# Altium PCB STM32WL_Before_RePlacement.PcbDoc (part 1 of 2)
Units mm, origin at the board's own origin, x right, y up, seen from the top; angles counter-clockwise.
Board outline 40.25 x 54.25 mm, 4 copper layers (Top Layer, Int1 (GND), Int2 (PWR), Bottom Layer), stack 1.57 mm thick; 116 components, 68 nets, 370 pads, 249 vias.
Unrouted connection lines stored in the file: 2.
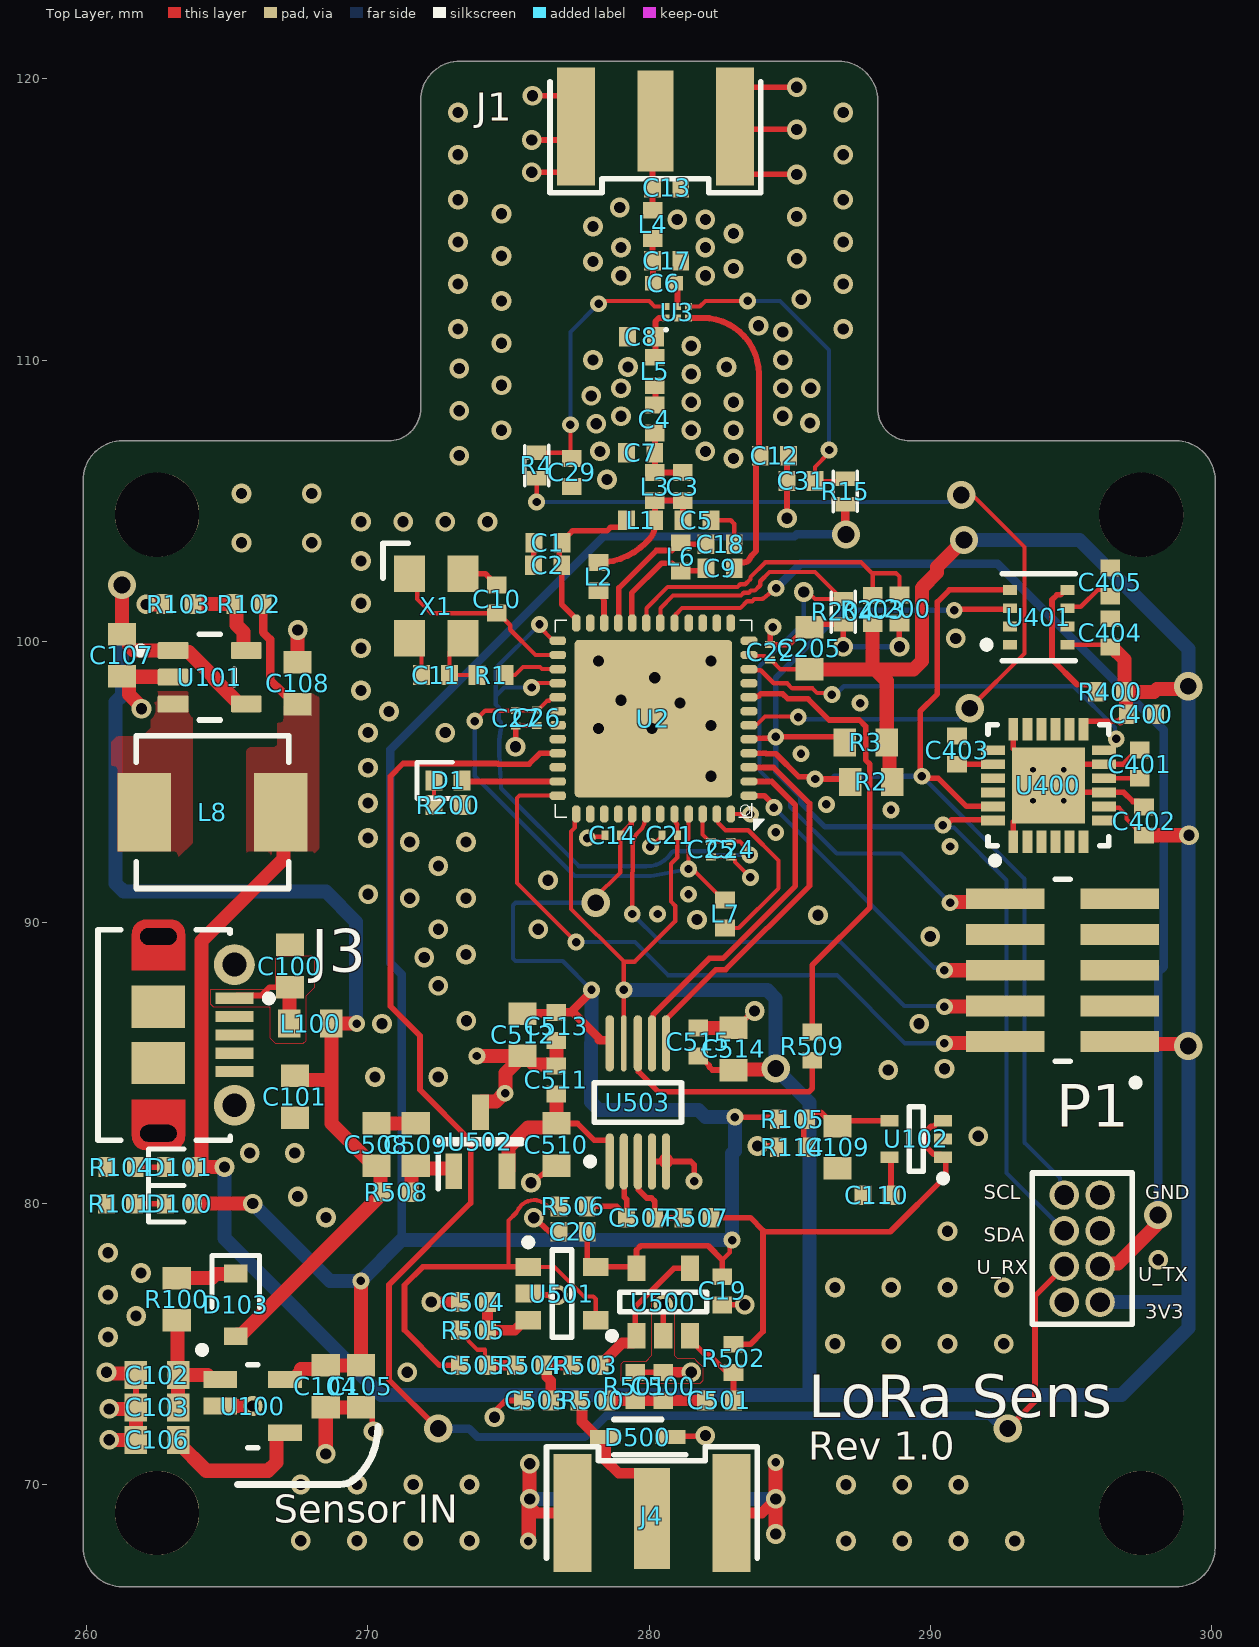
[diagram p0: Top Layer view]
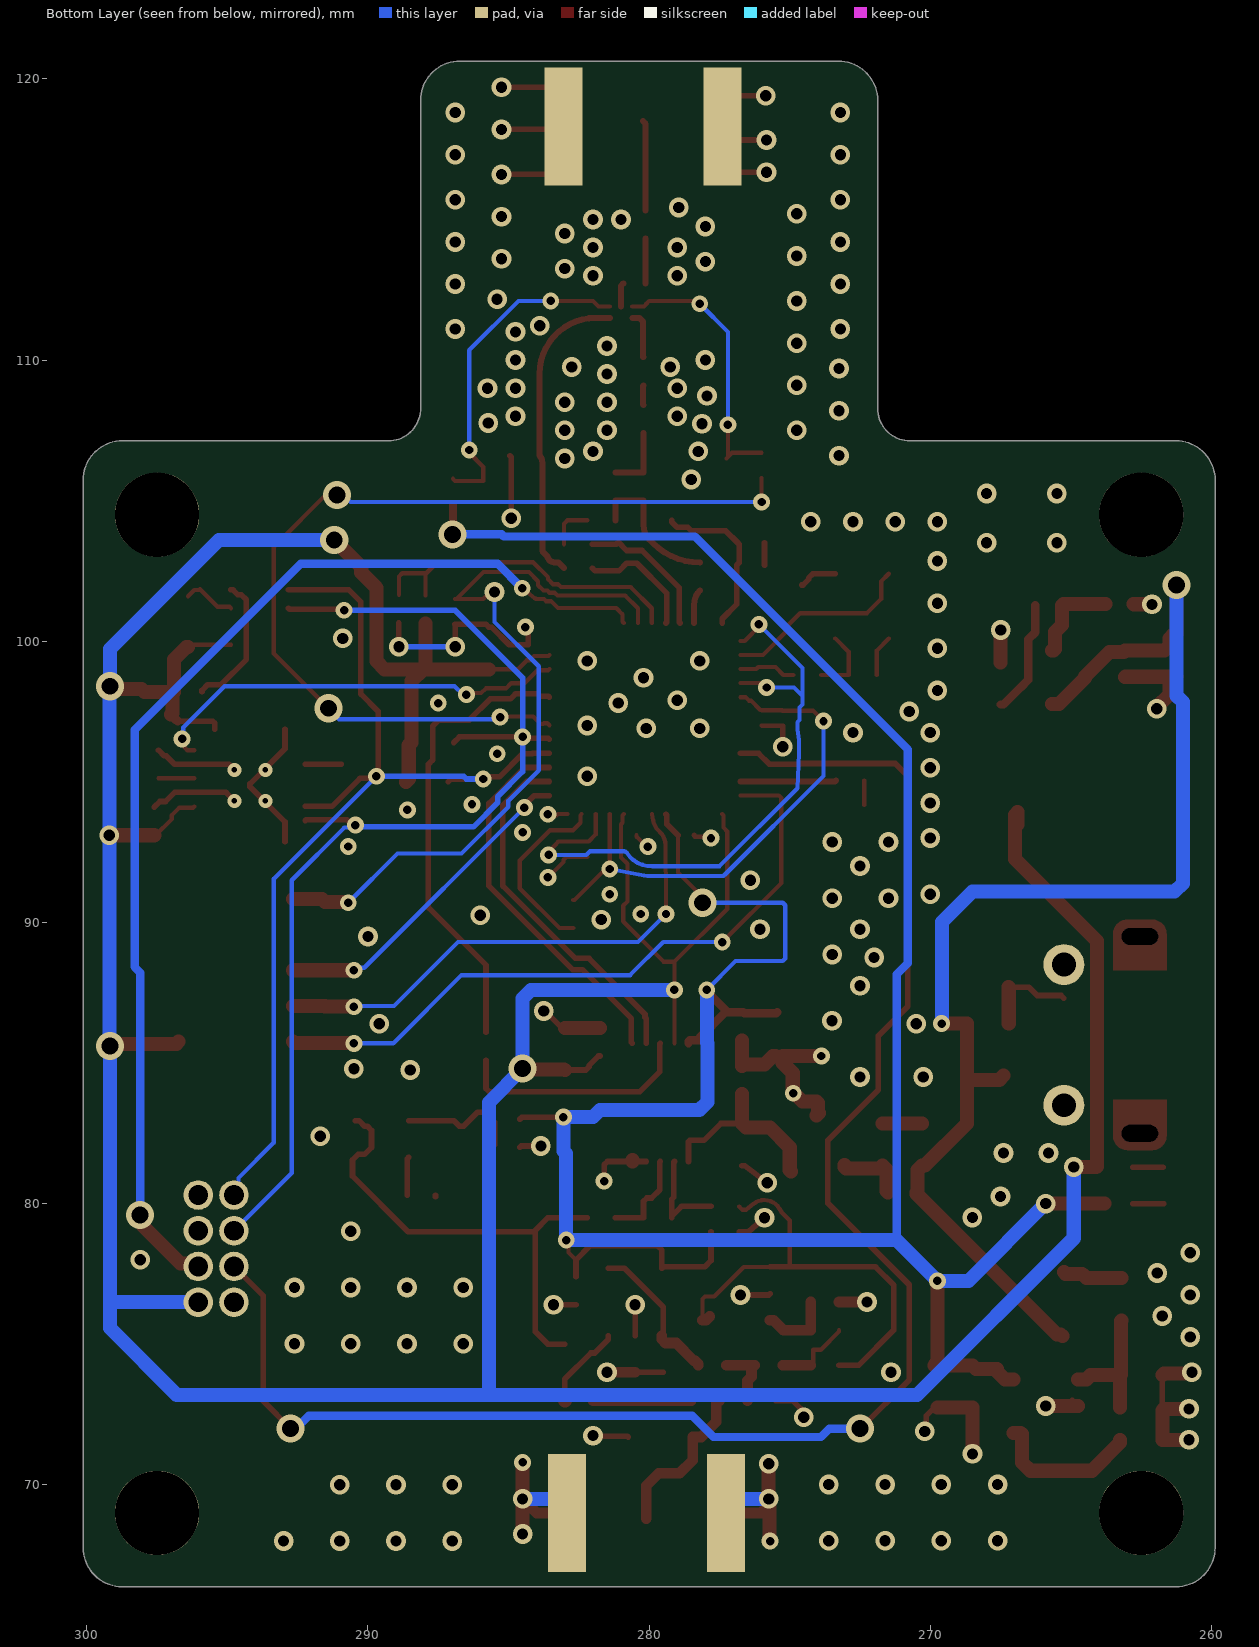
[diagram p1: Bottom Layer view, seen from below]
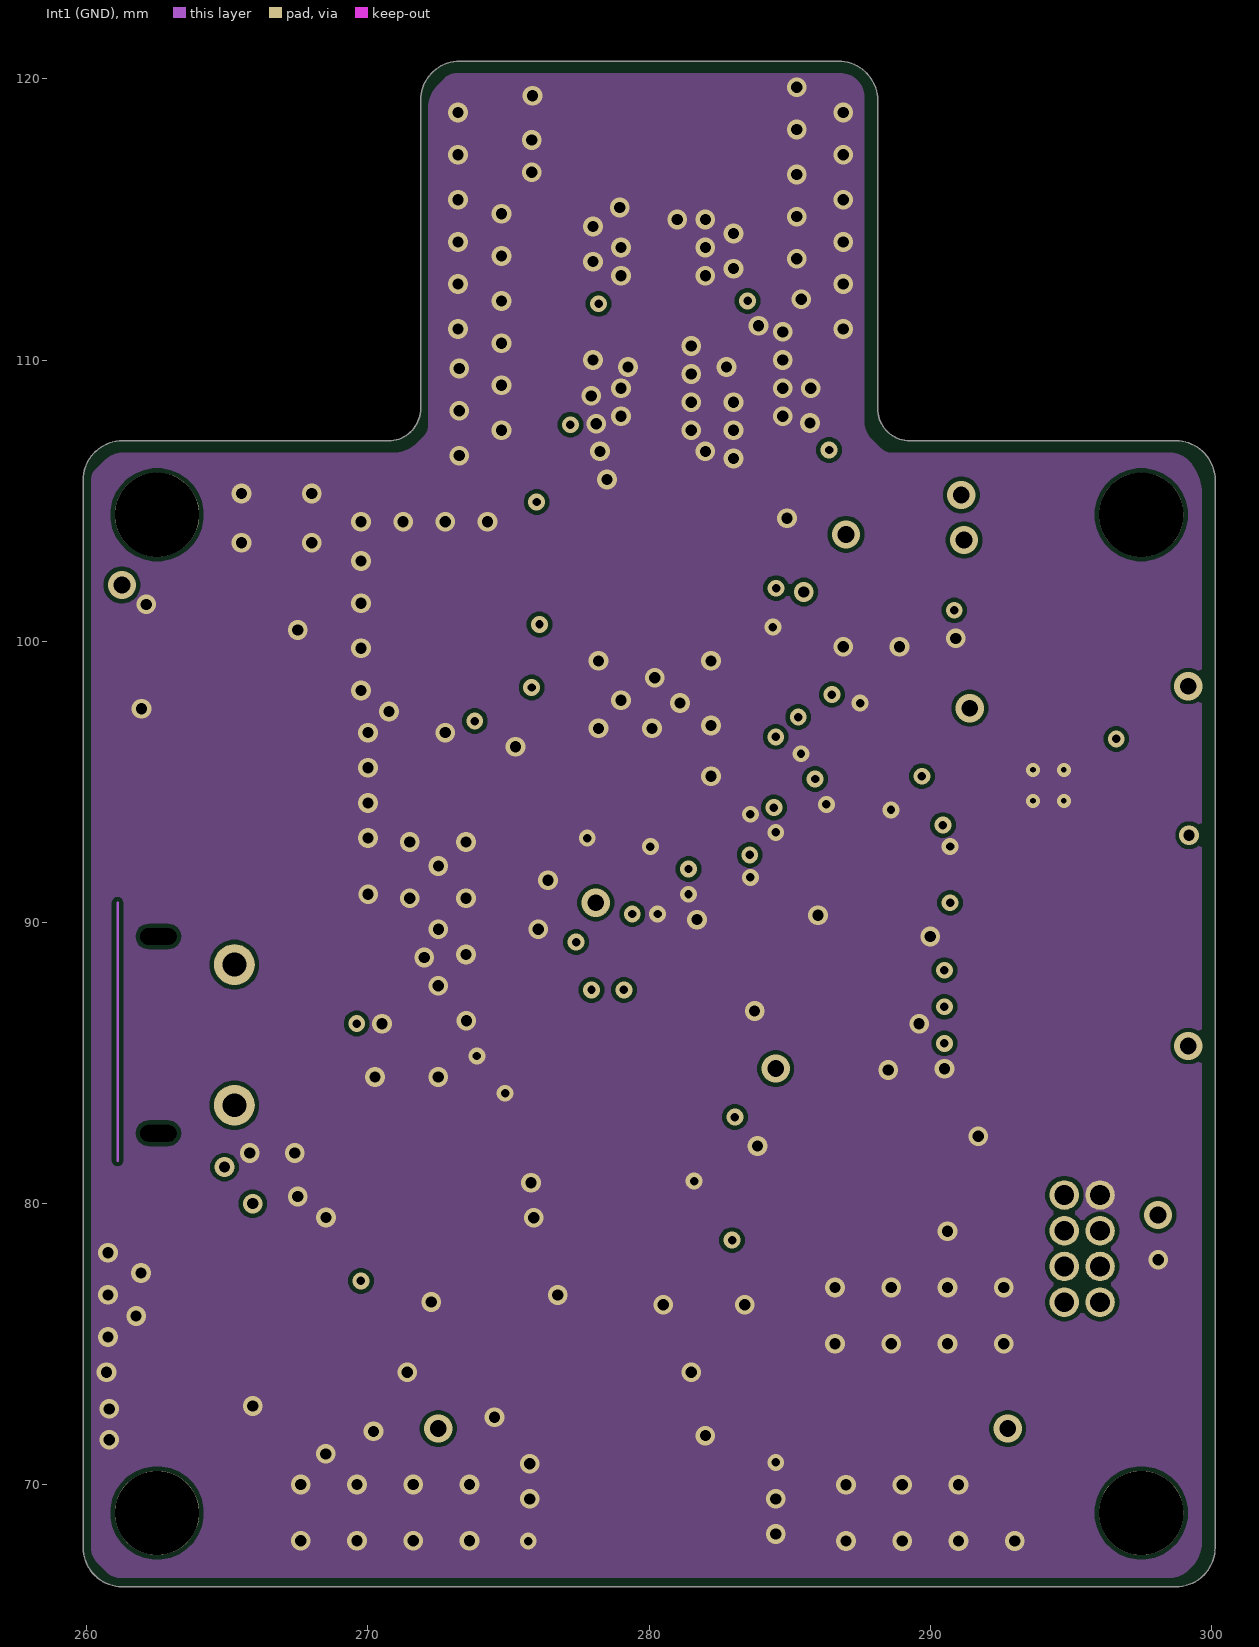
[diagram p2: Int1 (GND)]
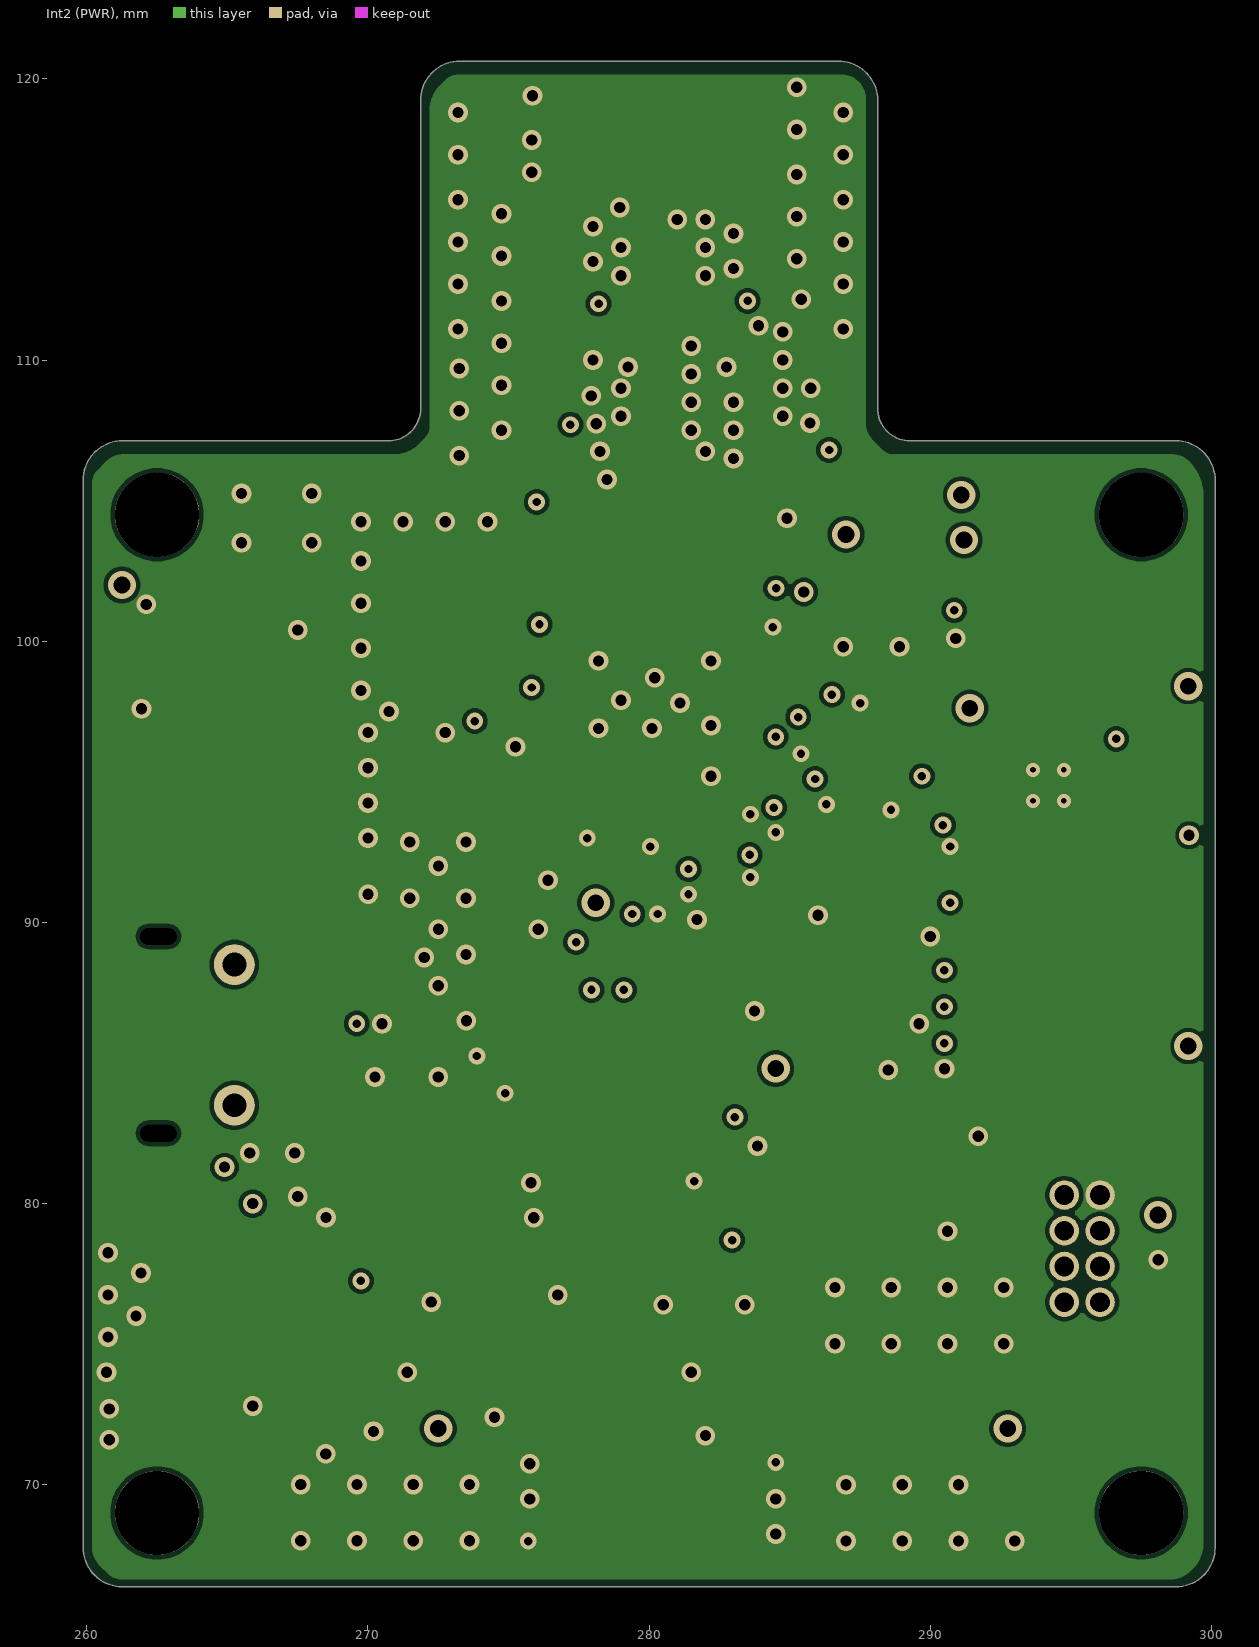
[diagram p3: Int2 (PWR)]
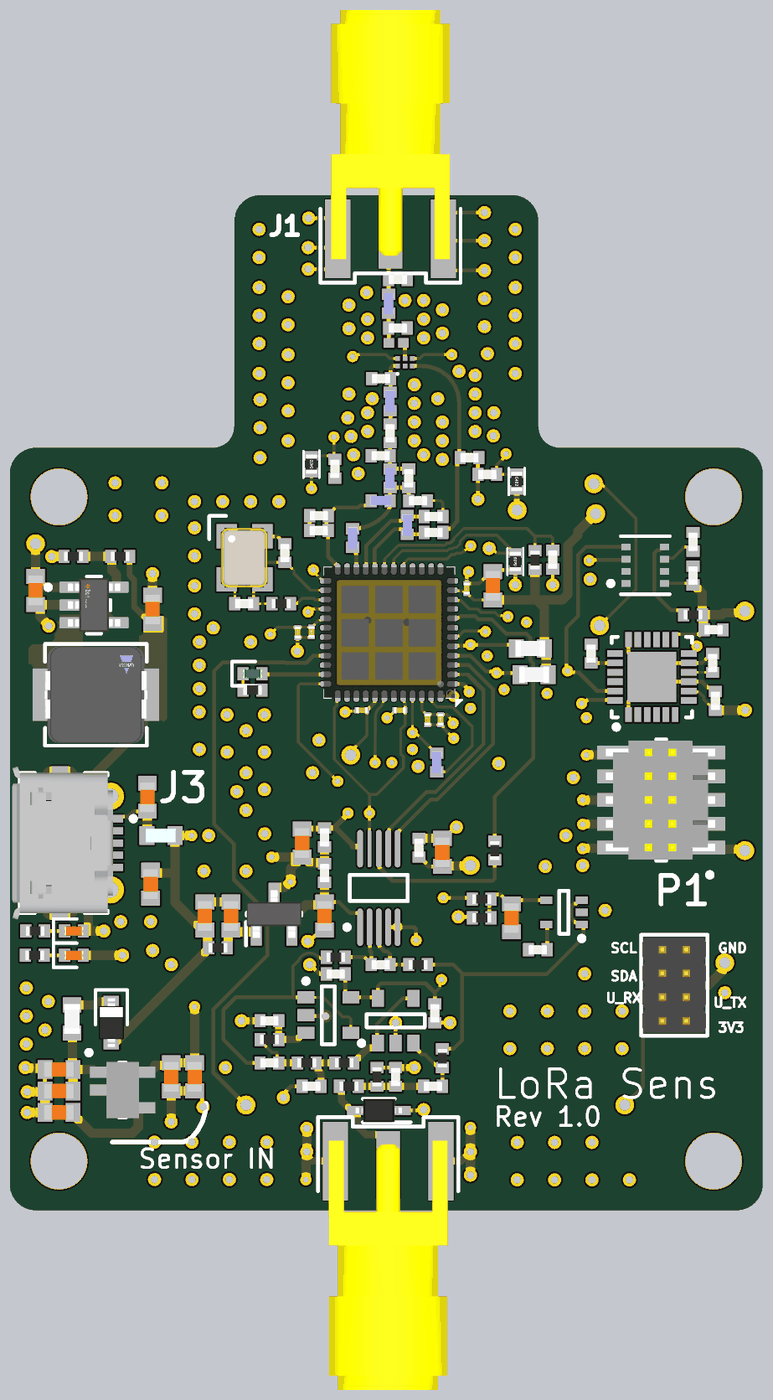
[diagram p5: 3D render of the assembled board from above, using the file's embedded part models]

## Layer stack, top to bottom
Top Solder: solder mask 0.0254, SM-001, Dk 4
Top Layer: signal copper 0.035
Dielectric 1: prepreg 0.2, PP-017, Dk 4.6
Int1 (GND): signal copper 0.0175
Dielectric 3: core 1.065, Core-039, Dk 4.6
Int2 (PWR): signal copper 0.0175
Dielectric 5: prepreg 0.2, PP-017, Dk 4.6
Bottom Layer: signal copper 0.035
Bottom Solder: solder mask 0.0254, SM-001, Dk 4

## Board outline
259.873,67.77 259.873,103 259.873,105.73 cw(c261.27,105.73) 261.27,107.127 270.73,107.127 ccw(c270.73,108.27) 271.873,108.27 271.873,119.23 cw(c273.27,119.23) 273.27,120.627 286.73,120.627 cw(c286.73,119.23) 288.127,119.23 288.127,108.27 ccw(c289.27,108.27) 289.27,107.127 298.73,107.127 cw(c298.73,105.73) 300.127,105.73 300.127,104.9 300.127,67.77 cw(c298.73,67.77) 298.73,66.373 261.27,66.373 261.269,66.373 cw(c261.27,67.77)

## Design rules (kind name [scope] priority, off if disabled: settings)
Clearance [All] p1: gap=0.15 ignorepadtopadclearanceinfootprint=FALSE
DiffPairsRouting [InDifferentialPairClass('All Differential Pairs')] p1: maxlimit=0.254 minlimit=0.254 mostfreqgap=0.254 toplayer_minwidth=0.2 toplayer_maxwidth=0.381 toplayer_prefwidth=0.2 midlayer1_minwidth=0.2 midlayer1_maxwidth=0.381 midlayer1_prefwidth=0.2 midlayer2_minwidth=0.2 midlayer2_maxwidth=0.381 midlayer2_prefwidth=0.2 bottomlayer_minwidth=0.2 bottomlayer_maxwidth=0.381 bottomlayer_prefwidth=0.2 maxuncoupledlength=12.7
HoleSize [All] p1: absolutevalues=TRUE maxlimit=3 minlimit=0.025 maxpercent=80.000 minpercent=20.000
MinimumSolderMaskSliver [All] p1: minsoldermaskwidth=0
PolygonConnect [All] p1: thpad.connectstyle=Direct thpad.reliefconductorwidth=0.254 thpad.reliefentries=4 thpad.polygonreliefangle="90 Angle" thpad.airgapwidth=0.254 smdpad.connectstyle=Relief smdpad.reliefconductorwidth=0.254 smdpad.reliefentries=4 smdpad.polygonreliefangle="90 Angle" smdpad.airgapwidth=0.254 via.connectstyle=Direct via.reliefconductorwidth=0.254 via.reliefentries=4 via.polygonreliefangle="90 Angle" via.airgapwidth=0.254
RoutingVias [All] p1: holewidth=0.3 width=0.6 viastyle="Through Hole" minholewidth=0.6 minwidth=1 maxholewidth=0.6 maxwidth=1
SilkToSolderMaskClearance [IsText] p1: minsilkscreentomaskgap=0.254 clearancetoexposedcopper=TRUE
SolderMaskExpansion [All] p1: expansion=0.102 istentingtop=FALSE
Width RF_50_Ohm [InNetClass('RF_50_Ohm')] p1: maxlimit=0.214 minlimit=0.164 preferedwidth=0.214 toplayer_minwidth=0.214 midlayer1_maxwidth=0.164 midlayer1_prefwidth=0.164 midlayer2_maxwidth=0.164 midlayer2_prefwidth=0.164 bottomlayer_minwidth=0.214 impedanceprofiledriven=TRUE impedanceprofileid={E45D36C0-3E41-45CE-B1B2-043B86276FE5} impedanceprofilevalue=50.000000 minimp=50.000000 maximp=50.000000 favimp=50.000000
Width [InNetClass('All Nets')] p2: maxlimit=0.5 minlimit=0.15 preferedwidth=0.2
26 further rules are at their usual default settings.

## Classes and differential pairs
net class RF_50_Ohm: MCU_RF_OUT NetC3_1 NetC3_2 NetC4_2 NetC6_1 NetC6_2 NetC8_2 NetC9_2 NetC13_2
component class stm32wl_Power: C100 C101 C102 C103 C104 C105 C106 C107 C108 C109 C110 D100 D101 D103 J3 L8 L100 R100 R101 R102 R103 R104 R105 R114 U100 U101 U102
component class STM32WL_ADC: C19 C20 C500 C501 C503 C504 C505 C507 C508 C509 C510 C511 C512 C513 C514 C515 D500 J4 R500 R501 R502 R503 R504 R505 R506 R507 R508 R509 U500 U501 U502 U503
component class STM32WL_Sensors: C400 C401 C402 C403 C404 C405 R400 U400 U401
component class STM32WL_MCU_IOs: B1 B2 C14 C21 C22 C38 C200 C205 D1 P1 R2 R3 R200 R203 R204 U8
component class STM32WL_RF: C1 C2 C3 C4 C5 C6 C7 C8 C9 C10 C11 C12 C13 C17 C18 C24 C25 C26 C27 C29 CN1 J1 L1 L2 L3 L4 L5 L6 L7 R1 R4 R15 U2 U3 X1
differential pair RFI_RX: +RFI_RX_P -RFI_RX_N

## Components (designator, comment, footprint, x,y, rotation, side; value= is the part's Value field where it differs from the comment)
C1 "68p" CAP_0402 276.4,103.5 r0 top
C2 "47n" CAP_0402 276.391,102.7 r0 top
C3 "3p5" CAP_0402 281.2,105.5 r90 top
C4 "68p" CAP_0402 280.2,107.9 r90 top
C5 "5p5" CAP_0402 281.7,104.3 r180 top
C6 "GRM1555C1H680JA01D" CAPC1005X55X25LL05T10 280.525,112.725 r0 top
C7 "5p5" CAP_0402 279.7,106.7 r0 top
C8 "C0402_16V" CAP_0402 279.725,110.825 r0 top
C9 "4p5" CAP_0402 282.525,102.6 r0 top
C10 "10p" CAP_0402 274.579,101.498 r270 top
C11 "10p" CAP_0402 272.404,98.798 r0 top
C12 "C0402_16V" CAP_0402 284.45,106.6 r180 top
C13 "68p" CAP_0402 280.625,116.125 r180 top
C14 "100n" CAP_0201 278.7,93.1 r0 top
C17 "68p" CAP_0402 280.625,113.525 r180 top
C18 "4p5" CAP_0402 282.525,103.45 r180 top
C19 "100n" CAP_0402 282.6,76.9 r270 top
C20 "100n" CAP_0402 277.3,79 r180 top
C21 "100n" CAP_0201 280.725,93.1 r0 top
C22 "100n" CAP_0201 284.3,99.6 r270 top
C24 "4u7" CAP_0201 282.9,92.6 r90 top
C25 "100n" CAP_0201 282.2,92.6 r90 top
C26 "100n" CAP_0201 276,97.281 r90 top
C27 "470n" CAP_0201 275.258,97.256 r90 top
C29 "C0402_16V" CAP_0402 277.25,106 r90 top
C31 "100n" CAP_0402 285.4,105.7 r0 top
C100 "1u" CAP_0603 267.225,88.45 r270 top
C101 "1u" CAP_0603 267.4,83.8 r90 top
C102 "1u" CAP_0603 262.5,73.9 r0 top
C103 "100n" CAP_0603 262.5,72.75 r0 top
C104 "100n" CAP_0603 268.5,73.5 r90 top
C105 "1u" CAP_0603 269.75,73.5 r90 top
C106 "10n" CAP_0603 262.5,71.6 r0 top
C107 "4u7" CAP_0603 261.25,99.5 r90 top
C108 "10u" CAP_0603 267.5,98.5 r270 top
C109 "22u" CAP_0603 286.7,82 r90 top
C110 "100n" CAP_0402 288.1,80.3 r180 top
C200 "100n" CAP_0402 288.9,101.15 r90 top
C205 "10u" CAP_0603 285.7,99.75 r270 top
C400 "100n" CAP_0402 297.5,97.4 r180 top
C401 "100n" CAP_0402 297.45,95.625 r270 top
C402 "10n" CAP_0402 297.6,93.6 r270 top
C403 "2n2" CAP_0402 290.95,96.125 r270 top
C404 "100n" CAP_0402 296.4,100.3 r270 top
C405 "100n" CAP_0402 296.4,102.1 r270 top
C500 "150p" CAP_0402 280.5,73.5 r270 top
C501 "100n" CAP_0402 282.5,73 r180 top
C503 "1n" CAP_0402 276,73 r0 top
C504 "150p" CAP_0402 273.75,76.5 r0 top
C505 "100n" CAP_0402 273.75,74.25 r0 top
C507 "150p" CAP_0402 279.7,79.5 r0 top
C508 "10u" CAP_0603 270.3,82.1 r270 top
C509 "10u" CAP_0603 271.7,82.1 r270 top
C510 "10u" CAP_0603 276.7,82.1 r90 top
C511 "100n" CAP_0402 276.7,84.4 r270 top
C512 "10u" CAP_0603 275.5,86 r90 top
C513 "100n" CAP_0402 276.7,86.3 r90 top
C514 "10u" CAP_0603 283,85.5 r270 top
C515 "100n" CAP_0402 281.75,85.75 r270 top
D1 "GREEN" LED_0402_GREEN 272.85,95.05 r180 top
D100 "RED" LED_0402_RED 263.3,80 r180 top
D101 "RED" LED_0402_RED 263.3,81.3 r180 top
D103 "D_SCHOTTKY_SOD_323" SOD-323 265.3,76.4 r90 top
D500 "PESD3V3L1BA" SOD2512X110N 279.6,71.7 r180 top
J1 "SMA_T_9.52_NF" CO_SAMTEC_SMA-J-P-ST-EMI 280.225,120.4 r180 top locked
J2 "FTSH-105-01-L-DV-K-TR" FP-FTSH-105-01-L-DV-K-TR-MFG 294.7,88.3 r90 top
J3 "105017-0001" USB-MICRO-B_V 263.9,86 r270 top locked
J4 "SMA_T_9.52_NF" CO_SAMTEC_SMA-J-P-ST-EMI 280.1,66.9 r0 top
L1 "47n" IND_0402 279.7,104.3 r180 top
L2 "4n4" IND_0402 278.2,102.3 r90 top
L3 "3n4" IND_0402 280.2,105.5 r90 top
L4 "8n7" IND_0402 280.125,114.825 r270 top
L5 "L0402" IND_0402 280.2,109.6 r90 top
L6 "12n" IND_0402 281.125,103 r270 top
L7 "15u" IND_0402 282.7,90.3 r270 top
L8 "15u" FP-IHLP-2020CZ-FP_1_905x2-MFG 264.472,93.922 r0 top
L100 "10n" IND_0603 267.95,86.4 r0 top
P1 "62200821121" 62200821121 295.4,78.4 r270 top
R1 "0R" RES_0402 274.379,98.798 r0 top
R2 "R0603" RES_0603 287.9,95 r0 top
R3 "R0603" RES_0603 287.7,96.4 r0 top
R4 "" R0402 276,106.25 r90 top value=100R
R15 "" R0402 286.975,105.325 r270 top value=100R
R100 "10R" RES_0603 263.2,76.6 r270 top
R101 "1k" RES_0402 261.2,80 r0 top
R102 "100k" RES_0402 265.772,101.322 r0 top
R103 "22k" RES_0402 263.272,101.322 r0 top
R104 "1k" RES_0402 261.226,81.3 r0 top
R105 "1k" RES_0402 285.1,83 r180 top
R114 "1k" RES_0402 285.1,82 r0 top
R200 "1k" RES_0402 272.85,94.175 r180 top
R203 "2k2" RES_0402 287.95,101.125 r270 top
R204 "" R0402 286.902,101.05 r90 top value=1K
R400 "2k2" RES_0402 296.4,98.2 r0 top
R500 "1k" RES_0402 278,73 r0 top
R501 "2M2" RES_0402 279.5,73.5 r270 top
R502 "2M2" RES_0402 283,74.5 r90 top
R503 "6k8" RES_0402 277.75,74.25 r0 top
R504 "22k" RES_0402 275.75,74.25 r0 top
R505 "12k" RES_0402 273.75,75.5 r180 top
R506 "1k" RES_0402 277.3,79.9 r180 top
R507 "1k" RES_0402 281.7,79.5 r0 top
R508 "49R9" RES_0402 271,80.4 r0 top
R509 "0R" RES_0402 285.8,85.6 r270 top
U2 "STM32WLxx_QFN48" STM32WLxx_QFN48 280.15,97.25 r180 top locked
U3 "BGS12SN6" INF-TSNP-6-2_V 281,111.7 r90 top
U100 "LD3985M33R" FP-SOT23-5L-7049676-MFG 265.9,72.8 r0 top
U101 "TLV62569DBVR" FP-DBV0005A-MFG 264.372,98.722 r0 top
U102 "MCP6001T-E/LT" SC70-LT5_L 289.5,82.3 r180 top
U400 "MPU-6050" IS-QFN-24_V 294.2,94.875 r90 top
U401 "BME280" FP-BME280-MFG 293.85,100.85 r180 top
U500 "MCP6001T-E/OT" SOT-23-OT5_L 280.5,76.5 r90 top
U501 "MCP6001T-E/OT" SOT-23-OT5_L 276.9,76.8 r0 top
U502 "REF3033AIDBZRG4" SOT95P237X112-3N 274,82.2 r90 top
U503 "ADC141S626CIMM/NOPB" MUB10A_M 279.6,83.6 r90 top
X1 "24MHz" XTAL_3225 272.429,101.248 r270 top

## Footprints (in the part's own frame and the unit in brackets; to place one, negate y for a bottom-side part, rotate by r counter-clockwise, add the part's x,y. Pads: shape width x height; smd on the part's side, far side on the other; paste and mask are expansions set on the pad)
62200821121 [mm] "Pin Header, pitch 1.27 mm, THT, Vertical, dual row, 8p"
  round 1.05 hole 0.7: 1(-1.905,-0.635) 2(-1.905,0.635) 3(-0.635,-0.635) 4(-0.635,0.635) 5(0.635,-0.635) 6(0.635,0.635) 7(1.905,-0.635) 8(1.905,0.635)
  silkscreen extent -2.69,-1.78 2.69,1.78, body extent -2.54,-1.7 2.54,1.7, height 5.33
CAP_0201 [mm]
  rect 0.25x0.35 smd mask+0.05: 1(-0.275,0) 2(0.275,0)
  body extent -0.32,-0.17 0.32,0.16, height 0.34
CAP_0402 [mm]
  rect 0.6x0.7 smd: 1(-0.5,0) 2(0.5,0)
  body extent -0.5,-0.26 0.5,0.26, height 0.37
CAP_0603 [mm]
  rect 0.8x1 smd: 1(-0.75,0) 2(0.75,0)
  body extent -0.8,-0.4 0.8,0.4, height 0.51
CAPC1005X55X25LL05T10 [mm] "Chip Capacitor, 2-Leads, Body 1.00x0.50mm, IPC High Density"
  rect 0.56x0.52 smd: 1(-0.39,0) 2(0.39,0)
  body extent -0.53,-0.28 0.53,0.28, height 0.55
CO_SAMTEC_SMA-J-P-ST-EMI [mm] "SMA Jack CMS, Edge Mountt Receptacle 50Ohm, 5-Leads, Body 6.35x6.35x9.52mm, pitch 2.825mm"
  rect 1.27x3.6 smd mask+0.05: 1(0,1.9)
  rect 1.35x4.2 smd mask+0.05: 2(-2.825,2.1) 2(2.825,2.1)
  rect 1.35x4.2 smd far side mask+0.05: 2(-2.825,2.1) 2(2.825,2.1)
  silkscreen extent -3.75,0.5 3.75,4.45, body extent -3.17,-10.13 3.17,3.2, height 3.8
FP-BME280-MFG [mm]
  rect 0.5x0.35 smd paste+0 mask+0: 1(1.025,0.975) 2(1.025,0.325) 3(1.025,-0.325) 4(1.025,-0.975) 5(-1.025,-0.975) 6(-1.025,-0.325) 7(-1.025,0.325) 8(-1.025,0.975)
  silkscreen extent -1.3,-1.55 1.97,1.55
FP-DBV0005A-MFG [mm]
  rrect17% 1.1x0.6 smd paste+0 mask+0: 1(-1.3,0.95) 2(-1.3,0) 3(-1.3,-0.95) 4(1.3,-0.95) 5(1.3,0.95)
  silkscreen extent -2.57,-1.53 0.87,1.53, body extent -1.95,-1.78 1.95,1.78, height 0.25
FP-FTSH-105-01-L-DV-K-TR-MFG [mm]
  rect 0.74x2.79 smd paste+0 mask+0: 1(-2.54,-2.035) 2(-2.54,2.035) 3(-1.27,-2.035) 4(-1.27,2.035) 5(0,-2.035) 6(0,2.035) 7(1.27,-2.035) 8(1.27,2.035) 9(2.54,-2.035) 10(2.54,2.035)
  silkscreen extent -4.12,-2.73 3.24,0.27, body extent -3.34,-3.53 3.34,3.53, height 0.25
FP-IHLP-2020CZ-FP_1_905x2-MFG [mm]
  rect 1.905x2.79 smd paste+0 mask+0: 1(-2.425,0) 2(2.425,0)
  silkscreen extent -2.72,-2.72 2.72,2.72, body extent -3.48,-2.82 3.48,2.82, height 0.25
FP-SOT23-5L-7049676-MFG [mm]
  rect 1.2x0.6 smd paste+0 mask+0: 1(-1.15,0.95) 2(-1.15,0) 4(1.15,-0.95) 5(1.15,0.95)
  silkscreen extent -1.92,-1.48 0.18,2.12, body extent -1.85,-1.58 1.85,1.57, height 0.25
IND_0402 [mm]
  rect 0.6x0.7 smd: 1(-0.5,0) 2(0.5,0)
  body extent -0.56,-0.26 0.56,0.26, height 0.67
IND_0603 [mm]
  rect 0.8x1 smd: 1(-0.75,0) 2(0.75,0)
  body extent -0.81,-0.37 0.81,0.37, height 0.87
INF-TSNP-6-2_V [mm] "TSNP, 6-Leads, Body 1.1x0.7mm, Pitch 0.4mm"
  rect 0.25x0.25 smd: 1(-0.2,0.4) 2(-0.2,0) 3(-0.2,-0.4) 4(0.2,-0.4) 5(0.2,0) 6(0.2,0.4)
  silkscreen extent -0.67,0.35 -0.58,0.45, body extent -0.35,-0.55 0.35,0.55, height 0.4
IS-QFN-24_V [mm] "QFN, 24-Leads, Body 4x4mm, Pitch 0.5mm, Thermal Pad 2.7x2.6mm"
  rect 0.8x0.35 smd: 1(-2,1.25) 2(-2,0.75) 3(-2,0.25) 4(-2,-0.25) 5(-2,-0.75) 6(-2,-1.25) 13(2,-1.25) 14(2,-0.75) 15(2,-0.25) 16(2,0.25) 17(2,0.75) 18(2,1.25)
  rect 0.35x0.85 smd mask+0.102: 7(-1.25,-1.975) 8(-0.75,-1.975) 9(-0.25,-1.975) 10(0.25,-1.975) 11(0.75,-1.975) 12(1.25,-1.975) 19(1.25,1.975) 20(0.75,1.975) 21(0.25,1.975) 22(-0.25,1.975) 23(-0.75,1.975) 24(-1.25,1.975)
  rect 2.7x2.6 smd: 25(0,0)
  silkscreen extent -2.8,-2.15 2.15,2.15, body extent -2,-2 2,2, height 0.95
LED_0402_GREEN [mm]
  rect 0.6x0.7 smd: A(-0.5,0) K(0.5,0)
  silkscreen extent -0.15,-0.65 1.1,0.65, body extent -0.51,-0.25 0.51,0.25, height 0.45
LED_0402_RED [mm]
  rect 0.6x0.7 smd: A(-0.5,0) K(0.5,0)
  silkscreen extent -0.15,-0.65 1.1,0.65, body extent -0.51,-0.25 0.51,0.25, height 0.45
MUB10A_M [mm] "TSSOP, 10-Leads, Body 3x3mm, Pitch 0.5mm, IPC Low Density"
  oval 2x0.3 smd: 1(-2.1,1) 2(-2.1,0.5) 3(-2.1,0) 4(-2.1,-0.5) 5(-2.1,-1) 6(2.1,-1) 7(2.1,-0.5) 8(2.1,0) 10(2.1,1)
  oval 2x0.2 smd: 9(2.1,0.5)
  silkscreen extent -2.22,-1.55 0.7,1.82, body extent -1.55,-1.55 1.55,1.55, height 1.09
R0402 [mm]
  rect 0.51x0.7 smd mask+0.05: 1(-0.45,0) 2(0.45,0)
  silkscreen extent -0.72,-0.43 0.72,0.43, body extent -0.52,-0.3 0.52,0.3, height 0.4
RES_0402 [mm]
  rect 0.6x0.7 smd: 1(-0.5,0) 2(0.5,0)
  body extent -0.5,-0.25 0.5,0.25, height 0.3
RES_0603 [mm]
  rect 0.8x1 smd: 1(-0.75,0) 2(0.75,0)
  body extent -0.8,-0.43 0.8,0.43, height 0.52
SC70-LT5_L [mm] "SOT353, 5-Leads, Body 2x1.3mm, Pitch 0.65mm, Lead Span 2.1mm, IPC High Density"
  rect 0.65x0.4 smd: 1(-0.95,0.65) 2(-0.95,0) 3(-0.95,-0.65) 4(0.95,-0.65) 5(0.95,0.65)
  silkscreen extent -1.07,-1.15 0.25,1.52, body extent -0.67,-1.12 0.68,1.13, height 1.1
SOD2512X110N [mm]
  rect 1.1x0.5 smd: 1(-1.15,0) 2(1.15,0)
  silkscreen extent -1.7,-0.63 0.85,0.63, body extent -1.24,-0.62 1.24,0.63, height 0.93
SOD-323 [mm]
  rect 0.63x0.83 smd: A(-1.115,0) K(1.115,0)
  silkscreen extent -0.1,-0.85 1.75,0.85, body extent -1.3,-0.68 1.3,0.68, height 1.1
SOT95P237X112-3N [mm]
  rect 1.25x0.6 smd: 1(-1.05,0.95) 2(-1.05,-0.95) 3(1.05,0)
  silkscreen extent -1.68,-1.46 0.08,1.5, body extent -1.27,-1.46 1.27,1.46, height 1
SOT-23-OT5_L [mm] "SOT23, 5-Leads, Body 2.9x1.7mm, Pitch 0.95mm, Lead Span 2.8mm, IPC High Density"
  rect 0.9x0.65 smd: 1(-1.2,0.95) 2(-1.2,0) 3(-1.2,-0.95) 4(1.2,-0.95) 5(1.2,0.95)
  silkscreen extent -1.32,-1.55 0.35,1.95, body extent -0.9,-1.55 0.9,1.55, height 1.45
STM32WLxx_QFN48 [mm] "QFN48 7x7x0.55mm pitch 0.5mm"
  oct 0.6x0.3 smd mask+0.06: 1(-3.398,2.746) 2(-3.398,2.239) 3(-3.398,1.739) 4(-3.398,1.239) 5(-3.398,0.739) 6(-3.398,0.239) 7(-3.398,-0.261) 8(-3.398,-0.761) 9(-3.398,-1.261) 10(-3.398,-1.761) 11(-3.398,-2.261) 12(-3.398,-2.761) 25(3.398,-2.761) 26(3.398,-2.261) 27(3.398,-1.761) 28(3.398,-1.261) 29(3.398,-0.761) 30(3.398,-0.261) 31(3.398,0.239) 32(3.398,0.739) 33(3.398,1.239) 34(3.398,1.739) 35(3.398,2.239) 36(3.398,2.739)
  oct 0.3x0.6 smd mask+0.06: 13(-2.752,-3.399) 14(-2.252,-3.399) 15(-1.752,-3.399) 16(-1.252,-3.399) 17(-0.752,-3.399) 18(-0.252,-3.399) 19(0.248,-3.399) 20(0.748,-3.399) 21(1.248,-3.399) 22(1.748,-3.399) 23(2.248,-3.399) 24(2.748,-3.399) 37(2.748,3.399) 38(2.248,3.399) 39(1.748,3.399) 40(1.248,3.399) 41(0.748,3.399) 42(0.248,3.399) 43(-0.252,3.399) 44(-0.752,3.399) 45(-1.252,3.399) 46(-1.752,3.399) 47(-2.252,3.399) 48(-2.752,3.399)
  rrect5% 5.6x5.6 smd paste-3 mask+0.08: 49(0,0)
  silkscreen extent -3.95,-3.5 3.5,3.96, body extent -3.51,-3.51 3.51,3.51, height 0.78
USB-MICRO-B_V [mm] "USB, MICRO B, Body 7.491x4.695 mm, Pitch 0.65 mm"
  rect 0.4x1.35 smd: 1(-1.3,1.35) 2(-0.65,1.35) 3(0,1.35) 4(0.65,1.35) 5(1.3,1.35)
  round 1.45 hole 0.85: 6(-2.5,1.35) 7(2.5,1.35)
  rrect50% 0x0 hole 0.6 slot 1.3 at 90 deg: 8(-3.5,-1.35) 11(3.5,-1.35)
  rect 1.5x1.9 smd: 9(-1,-1.35) 10(1,-1.35)
  Top Layer circle w0.5: c-3.6,-1.8 r0.25
  Top Layer circle w0.5: c-3.6,-0.9 r0.25
  Top Layer circle w0.5: c3.6,-1.8 r0.25
  Top Layer circle w0.5: c3.6,-0.9 r0.25
  Top Layer region: -3.6,-1.8 -3.6,-0.9 -4.1,-0.9 -4.1,-1.8
  Top Layer region: 3.6,-0.9 3.6,-1.8 4.1,-1.8 4.1,-0.9
  Top Layer region: 2.3,-0.4 2.3,-2.3 3.6,-2.3 3.6,-0.4
  Top Layer region: -2.3,-2.3 -2.3,-0.4 -3.6,-0.4 -3.6,-2.3
  Int1 (GND) lines w0.1: 4.465,-2.8 -4.7,-2.8
  silkscreen extent -3.75,-3.5 3.75,2.7, body extent -4.1,-3.9 4.1,1.5, height 2.67
XTAL_3225 [mm]
  rect 1.3x1.1 smd: 1(-1.15,-0.95) 2(1.15,-0.95) 3(1.15,0.95) 4(-1.15,0.95)
  silkscreen extent -2.23,-1.89 -1,-1, body extent -1.6,-1.28 1.6,1.22, height 0.61

## Part data
C1 C2 C3 C4 C5 C7 C8 C9 C10 C11 C12 C13 C17 C19 C20 C29 C31 C110 C200 C400 C401 C402 C403 C404 C405 C500 C501 C503 C504 C505 C507 C511 C513 C515: library part CAP_0402_16V, "Capacitor SMD 0402 16V"
C6: library part CMP-2008-04406-1, Manufacturer=Murata, Part Number=GRM1555C1H680JA01D
C14 C21 C22 C24 C25 C26 C27: library part CAP_0201_16V, "Capacitor SMD 0201 16V"
C18: library part CAP_0402_16V
C100 C101 C102 C103 C104 C105 C106 C107 C108 C109 C205 C508 C509 C510 C512 C514: library part CAP_0603_16V, "Capacitor SMD 0603 16V"
D1: library part LED_0402_GREEN, "LED 0402 GREEN SMD"
D100 D101: library part LED_0402_RED, "LED 0402 RED SMD"
D103: "Diode Schottky SMD SOD-323"
D500: "TVS Diode (Bi-directional)", Manufacturer_Name=Nexperia, Mouser Part Number=N/A, Datasheet Link=https://datasheet.datasheetarchive.com/originals/distributors/Datasheets-26/DSA-502681.pdf, Height=1.1mm, Manufacturer_Part_Number=PESD3V3L1BA, Mouser Price/Stock=https://www.mouser.co.uk/ProductDetail/Nexperia/PESD3V3L1BA?qs=vHuUswq2%252BswBNSPO0jzUyg%3D%3D
J1 J4: "SMA End Launch Jack 1.0 mm Board, 50 ohm", Manufacturer="COAX CONNECTORS LTD", Manufacturer_Part_Number=30-462-D3-1.1mm
J2: library part CMP-2000-06293-2, "CONN HEADER SMD 10POS 1.27MM", Color=Black, Current Rating=1.75A, Max Operating Temperature=125°C, Min Operating Temperature=-55°C, Package Quantity=550, Connector Type="Male Pin", Contact Material=Bronze, Contact Mating Length=0.12inch, Contact Plating=Gold, Depth=3.43mm, Gender=Male, Housing Color=Black, Housing Material=Polymer, Lead Free="Lead Free", Length=6.35mm, Max Current Rating=1.75A, Mount="Surface Mount", Number of Contacts=10, Number of Positions=10, Number of Rows=2, Orientation=Straight, Packaging="Tape and Reel", Pitch=1.27mm, Radiation Hardening=No, REACH SVHC="No SVHC", Row Spacing=0.05inch, Termination=Solder
J3: library part CMP-2000-05827-1, "Micro-USB B Receptacle, Right Angle, Bottom Mount, Surface Mount, with Solder Tabs, -30 to 85 degC, 5-Pin USB, RoHS, Tape and Reel", Manufacturer=Molex, Package Description="5-Leads USB, Micro B, Body 7.5 x 5 mm, Pitch 0.65 mm", Package Reference=MICRO-B, Package Version="Rev. F, 12/2012", Standard Package=1, Voltage - Max=30V, 3D Model=105017-0001.stp, Catalog Drawings=1050170001, Category=Connectors,Interconnects, Circuits=5, Connector Type=USB-microB, Datasheet URL=http://www.molex.com/elqNow/elqRedir.htm?ref=http://www.molex.com/webdocs/datasheets/pdf/en-us/1050170001_IO_CONNECTORS.pdf, Datasheet Version=03/2016, Family=USB,DVI,HDMIConnectors, Featured Product=Micro-USBConnectorsUSBConnectors, Features=Shielded,SolderRetention, Gender=Receptacle, Ingress Protection=-, Manufacturer URL=http://www.molex.com/, Mating Products=WM17145-ND-CABLEMICROUSBBTOSTDA1.0MWM17147-ND-CABLEMICROUSBBTOSTDA2.0MWM17146-ND-CABLEMICROUSBBTOSTDA1.5M, Mounting Technology=SurfaceMount, Mounting Type=BoardCutout,SurfaceMount,RightAngle, Number of Contacts=5, Online Catalog=Molex-MicroUSB, Other Names=WM1399DKR, Package URL=http://www.molex.com/pdm_docs/sd/1050170001_sd.pdf, Packaging=Digi-Reel®, PCN Assembly/Origin=ResinSupplier21/Oct/2015, RoHS Information=1050170001CertofCompliance, Series=-, Specifications=-
L1 L3 L4 L5 L6 L7: library part IND_0402, "Inductor SMD 0402"
L2: library part IND_0402, "Inductor SMD 0402 LQW15AN4N4G80D"
L8: library part CMP-02424-000234-1, "Fixed Inductors Commercial Low DCR Series 2.2uH 6.75A 25mΩ 20%", Case/Package=2020, Current Rating=6.75A, DC Resistance (DCR)=25mR, Inductance=2.2uH, Inductance Tolerance=20%, Max DC Current=5.5A, Max Operating Temperature=125°C, Min Operating Temperature=-55°C, Package Quantity=2000, Self Resonant Frequency=41MHz, Test Frequency=100kHz, Contact Plating=Tin, Core Material=Metal, Depth=5.43mm, Height=3mm, Height - Seated (Max)=0.118inch, Lead Free="Lead Free", Length=5.74mm, Military Standard=Not, Mount="Surface Mount", Packaging="Tape and Reel", Radiation Hardening=No, RMS Current (Irms)=6.75A, Saturation Current=5.5A, Shielding=Shielded, Termination=SMD/SMT, Tolerance=20%, Width=0.204inch
L100: library part IND_0603, "Inductor SMD 0603"
P1: library part CMP-1502-00947-1, "THT Vertical Pin Header WR-PHD, Pitch 1.27 mm, Dual Row, 8 pins", Contact Resistance=20mOhm, Manufacturer="Wurth Elektronik", Operating Temperature=-40to105degC, Rated Current=1A, Withstanding Voltage=500VAC, Working Voltage=100VAC, Datasheet URL=https://katalog.we-online.de/em/datasheet/62200821121.pdf, Gender=Male, Manufacturer URL=http://www.we-online.de, Mounting Technology=THT, Orientation=Vertical, Package Reference=62200821121, Packaging=Box, Part Number=62200821121, Pin Number=8, Pitch=1.27mm, Publisher=WurthElektronik, Row Number=Dual
R1 R101 R102 R103 R104 R105 R114 R200 R203 R400 R500 R501 R502 R503 R504 R505 R506 R507 R508 R509: library part RES_0402, "Resistor SMD 0402"
R2 R3 R100: library part RES_0603, "Resistor SMD 0603"
R4 R15: library part MCD-00119, "Resistor,100R,0402,1%,1/16W", Manufacturer=YAGEO, Manufacturer_Part_Number=RC0402FR-07100RL, Package=R0402, ComponentLink1Description=Datasheet, ComponentLink1URL=http://tunmcdsvn.tun.st.com/Component_Datasheet_Library/Trunk/Resistors/Yageo_Resistor_RC0402-series, ECCN_EU=NEC, ECCN_US=EAR99, Internal_Part_Number=MCD-00119, Part_Type=Resistor, Provided_By=SUBCO, Status=Released
R204: library part MCD-00061, "Resistor,1K,0402,1%,1/16W", Manufacturer=YAGEO, Manufacturer_Part_Number=RC0402FR-071KL, Package=R0402, ComponentLink1Description=Datasheet, ComponentLink1URL=http://tunmcdsvn.tun.st.com/Component_Datasheet_Library/Trunk/Resistors/Yageo_Resistor_RC0402-series, ECCN_EU=NEC, ECCN_US=EAR99, Internal_Part_Number=MCD-00061, Part_Type=Resistor, Provided_By=SUBCO, Status=Released
U2: "HQDC : Verified April, 25 2019", Manufacturer=STMicroelectronics, Manufacturer_Part_Number=STM32WLE5CC
U3: library part CMP-1088-00016-1, "Wideband RF SPDT Switch, 0.1 to 6 GHz, TSNP-6, Reel, Green", Frequency ( f ) Range="0.1 to 6 GHz", Manufacturer=Infineon, Supply Voltage Range="1.8 - 3.5", ComponentLink1Description="Manufacturer URL", ComponentLink1URL=http://www.infineon.com/, ComponentLink2Description=Datasheet, ComponentLink2URL=http://www.infineon.com/dgdl/BGS12SN6_2014-05-23.pdf?folderId=db3a30431f848401011fcbf2ab4c04c4&fileId=db3a30433f1b26e8013f2db58bc03856, ComponentLink3Description="Package Specification", ComponentLink3URL=http://www.infineon.com/dgdl/TSNP-6-2-Package_Overview.pdf?folderId=db3a304327b89750012805e1379a6124&fileId=db3a30433c6612b1013c6bcb02293ba1, DatasheetVersion="Rev. 1.2", Green=TRUE, Halogen-free=TRUE, Insertion Loss @1GHz="0.25 dB", Isolation @1GHz="40 dB", Mounting Technology="Surface Mount", PackageDescription="6-Pin Thin Small Non Leaded Package, 1.1 x 0.7 mm Body, 0.4 mm Pitch", PackageReference=TSNP-6-2, PackageVersion=Jan-13, Packing="Tape and Reel", PartNumber=BGS12SN6, Pmax="30 dBm", Switch Type=SPDT
U100: library part CMP-0244-00328-2, "IC REG LINEAR 3.3V 150MA SOT23-5", Case/Package=SOT-23, Dropout Voltage=60mV, Input Bias Current=85uA, Max Input Voltage=6V, Max Operating Temperature=125°C, Max Output Current=150mA, Min Current Limit=300mA, Min Input Voltage=2.5V, Min Operating Temperature=-40°C, Min Output Voltage=3.3V, Output Voltage Accuracy=2%, Package Quantity=1, Quiescent Current=150uA, Accuracy=2%, Height=1.3mm, Lead Free="Lead Free", Length=3mm, Mount="Surface Mount", Number of Outputs=1, Number of Pins=5, Number of Regulators=1, Output Current=150mA, Output Type=Fixed, Output Voltage=3.3V, Packaging="Tape and Reel", Polarity=Positive, Radiation Hardening=No, Width=1.75mm
U101: library part CMP-04918-000387-1, "IC REG BUCK ADJ 2A SOT23-5", Case/Package=SOT-23-5, Max Input Voltage=5.5V, Max Operating Temperature=125°C, Min Input Voltage=2.5V, Min Operating Temperature=-40°C, Min Output Voltage=600mV, Output Current=2A, Switching Frequency=1.5MHz, Max Output Voltage=5.5V, Mount="Surface Mount", Output Configuration=Positive, Output Type=Adjustable, Packaging="Cut Tape", RoHS Compliant=Yes, Synchronous Rectifier=Yes
U102: library part CMP-0187-00463-3, "None", Case/Package=SC, Input Bias Current=1pA, Input Offset Voltage (Vos)=4.5mV, Max Operating Temperature=125°C, Max Supply Voltage=6V, Min Operating Temperature=-40°C, Min Supply Voltage=1.8V, Nominal Supply Current=100uA, Operating Supply Voltage=5.5V, Output Current=23mA, Package Quantity=3000, Power Supply Rejection Ratio (PSRR)=86dB, Voltage Gain=112dB, Amplifier Type="GENERAL PURPOSE", Bandwidth=1MHz, Common Mode Rejection Ratio=60dB, Contact Plating=Tin, Gain Bandwidth Product=1MHz, Height=1mm, Input Offset Voltage-Max=4.5mV, Lead Free="Lead Free", Length=2.25mm, Mount="Surface Mount", Number of Amplifiers=1, Number of Channels=1, Number of Circuits=1, Number of Elements=1, Number of Pins=5, Packaging="Tape and Reel", Radiation Hardening=No, REACH SVHC="No SVHC", RoHS Compliant=Yes, Slew Rate=0.6V/µs, Slew Rate-Nom=0.6V/µs, Supply Current=100uA, Technology=CMOS, Unity Gain Bandwidth Product=1MHz, Width=1.35mm
U400: library part CMP-1753-00002-2, "3-Axis Gyroscope, Accelerometer and a Digital Motion Processor(TM) (DMP), 2.375 to 3.46 V, -40 to 85 degC, 24-Pin QFN, RoHS, Tape and Reel", Manufacturer=InvenSense, Standard Package=5,000, Category=Sensors,Transducers, Datasheet URL=http://datasheet.octopart.com/MPU-6050-InvenSense-datasheet-14421344.pdf, Datasheet Version="Rev. 3.3, 05/2012", Dynamic Catalog=MPU-6000™Series, Family=Multifunction, Featured Product=MPU-60506-Axis,IntegratedI²CSolution, Manufacturer URL=http://www.invensense.com/, Online Catalog=MPU-6000™Series, Other Names="1428-1007-2 / MPU6050", Output Type=Digital, Sensor Type=MotionTracking, Unit PriceUSD=Digital
U401: library part CMP-2000-05073-3, "SENSOR PRESSURE HUMIDITY TEMP", Case/Package=LGA, Max Operating Temperature=85°C, Min Operating Temperature=-40°C, Accuracy=3%, Lead Free="Lead Free", Mount="Surface Mount", Number of Pins=8, Output Type=SPI, Packaging="Cut Tape", Response Time=1s, Sensor Type=Temperature
U500 U501: library part CMP-0187-00458-3, "None", Case/Package=SOT-23, Input Bias Current=1pA, Input Offset Voltage (Vos)=4.5mV, Max Operating Temperature=125°C, Max Supply Voltage=6V, Min Operating Temperature=-40°C, Min Supply Voltage=1.8V, Nominal Supply Current=100uA, Operating Supply Voltage=5.5V, Output Current=23mA, Package Quantity=3000, Power Supply Rejection Ratio (PSRR)=86dB, Voltage Gain=112dB, Amplifier Type="GENERAL PURPOSE", Bandwidth=1MHz, Common Mode Rejection Ratio=60dB, Contact Plating=Tin, Gain Bandwidth Product=1MHz, Height=1.3mm, Input Offset Voltage-Max=4.5mV, Lead Free="Lead Free", Length=3.1mm, Mount="Surface Mount", Number of Amplifiers=1, Number of Channels=1, Number of Circuits=1, Number of Elements=1, Number of Pins=5, Operating Supply Current=100uA, Output Current per Channel=23mA, Packaging="Tape and Reel", Radiation Hardening=No, REACH SVHC="No SVHC", RoHS Compliant=Yes, Slew Rate=0.6V/µs, Slew Rate-Nom=0.6V/µs, Supply Current=100uA, Technology=CMOS, Unity Gain Bandwidth Product=1MHz, Voltage=6V, Width=1.8mm
U502: "Integrated Circuit", Manufacturer_Name="Texas Instruments", Mouser Part Number=595-REF3033AIDBZRG4, Arrow Part Number=REF3033AIDBZRG4, Arrow Price/Stock=https://www.arrow.com/en/products/ref3033aidbzrg4/texas-instruments, Datasheet Link=https://www.ti.com/lit/ds/symlink/ref3030.pdf?ts=1639296719724, Height=1.12mm, Manufacturer_Part_Number=REF3033AIDBZRG4, Mouser Price/Stock=https://www.mouser.co.uk/ProductDetail/Texas-Instruments/REF3033AIDBZRG4?qs=sSOk4GDDv7x3KhdEagQjiQ%3D%3D
U503: library part CMP-0054-00477-2, "14-Bit, 50 kSPS to 250 kSPS, Differential Input, Micro Power A/D Converter, 10-pin Mini SOIC, Pb-Free", Manufacturer="National Semiconductor", PackageTopMarking=ZXTT*X94C, PowerWise=Y, Code_JEDEC=MO-187-BA, ComponentLink1Description="ADC141S626 Datasheet", ComponentLink1URL=http://www.national.com/ds/AD/ADC141S626.pdf, ComponentLink2Description="ADC141S626 Web Page", ComponentLink2URL=http://www.national.com/pf/AD/ADC141S626.html, ComponentLink3Description="MUB10A Package Page", ComponentLink3URL=http://www.national.com/packaging/folders/mub10a.html, CompType="ADC IC", DatasheetVersion=Jan-2009, PackageDescription="Mini-SO, Molded, .118 x .118 x .034in Body, 10 Lead, .0197in Pitch", PackageReference=MUB10A, PackageVersion="revB, Jul-2003", PinCount=10, RevisionNote="Component URLs added", RoHS=Y
X1: library part TSX-3225_24.0000MF15X-AC, "Crystal SMD 24MHz 10PPM 7pF 3225", Load Capacitance=7pF, Manufacturer=Epson, Manufacturer Number="TSX-3225 24.0000MF15X-AC", ESR=40R, Type=XTAL

## Free pads (board coordinates)
  round 3 hole 3: MH(262.5,69) MH(262.5,104.5) MH(297.5,69) MH(297.5,104.5)

## Via types
v1: diameter 0.7, hole 0.4, Top Layer to Bottom Layer, 183 vias
v2: diameter 0.6, hole 0.3, Top Layer to Bottom Layer, 50 vias
v3: diameter 1, hole 0.6, Top Layer to Bottom Layer, 12 vias
v4: diameter 0.5, hole 0.2, Top Layer to Bottom Layer, 4 vias

## Nets (pads, with @x,y where several pads share a name; then routed paths per layer and width w, separated by ;. In a path a pad name is that pad's centre, name@x,y a point inside that pad or via, vN(x,y) a via of type N, cw(c..) or ccw(c..) an arc to the next point about the centre after c; other vN are vias at no path point)
+3V3: C21.2 C22.2 C108.2 C205.2 C400.2 C402.2 C404.2 C514.2 C515.2 D101.A J2.1 L8.2 P1.8 R2.2 R3.2 R102.2 R203.2 R400.2 U2.11 U2.37 U2.44 U400.8 U400.13 U401.8 U503.9 | length 166.5
  Top Layer w0.15: U2.37@277.402,93.851 277.358,93.807 277.358,93.371 277.225,93.238 277.225,90.479 279.1,88.604 ; U503.9@279.1,85.7 v2(279.1,87.6) 279.1,88.604 ; U2.44@280.902,93.851 280.946,93.807 280.946,93.543 281,93.489 281,92.313 280.775,92.088 280.775,90.741 280.925,90.591 280.925,90.041 279.488,88.604 279.1,88.604 ; U2.11@283.548,99.511 283.584,99.475 284.1,99.475 284.25,99.325 C22.2@284.3,99.325 284.35,99.325 284.675,99 C205.2@285.7,99 ; U401.8@294.875,99.875 296.325,99.875 C404.2@296.4,99.8 ; U400.8@296.175,94.125 296.225,94.075 296.714,94.075 296.975,93.814 296.975,93.675 297.55,93.1 C402.2@297.6,93.1
  Top Layer w0.2: C515.2@281.75,85.25 281.8,85.25 282.133,84.917 282.133,84.867 282.25,84.75 C514.2@283,84.75 ; U400.13@295.45,96.875 295.45,97.085 295.525,97.16 C400.2@296.76,97.16
  Top Layer w0.3: R102.2@266.272,101.272 266.272,100.316 266.522,100.066 266.522,98.622 266.785,98.359 266.791,98.359 267.4,97.75 C108.2@267.5,97.75 ; C400.2@296.76,97.16 296.8,97.2 296.85,97.2 297,97.35 C400.2@297,97.4
  Top Layer w0.5: v1(264.9,81.3) 264.1,81.3 264.075,81.325 264.075,89.332 266.993,92.25 266.993,93.826 L8.2@266.897,93.922 L8.2@266.897,93.479 ; C514.2@283,84.75 283.025,84.775 284.475,84.775 v3(284.5,84.8) ; C205.2@285.7,99 288.032,99 ; R203.2@287.95,100.625 287.95,99.082 288.032,99 ; R2.2@288.65,95 288.55,95.1 288.55,96.3 R3.2@288.45,96.4 288.45,98.582 288.032,99 ; v3(291.2,103.6) 290.239,102.639 290.239,102.439 289.7,101.9 289.7,99.293 289.407,99 288.032,99 ; C404.2@296.4,99.8 296.45,99.8 296.9,99.35 R400.2@296.9,98.2 ; J2.1@296.735,85.76 296.815,85.68 299.093,85.68 v3(299.173,85.6) ; C400.2@297,97.4 296.95,97.45 296.95,98.15 R400.2@296.9,98.2 ; C402.2@297.6,93.1 v1(299.2,93.1) ; v3(299.173,98.4) 299.077,98.304 298.054,98.304 297.95,98.2 R400.2@296.9,98.2
  Bottom Layer w0.5: v1(264.9,81.3) 264.9,78.769 270.469,73.2 285.7,73.2 ; v2(279.1,87.6) 284.2,87.6 284.5,87.3 v3(284.5,84.8) 285.7,83.6 285.7,73.2 ; v3(291.2,103.6) 295.3,103.6 299.173,99.727 v3(299.173,98.4) ; P1.8@296.035,76.495 299.168,76.495 299.173,76.5 ; v3(299.173,85.6) 299.173,76.5 ; v3@299.186,98.386 299.186,93.114 v1(299.2,93.1) 299.186,93.086 299.186,85.714 v3@299.2,85.7 ; 285.7,73.2 296.8,73.2 299.173,75.573 299.173,76.5
+3V3A: C14.2 C19.1 C20.1 C104.2 C105.2 C512.2 C513.2 D100.A R15.2 R105.2 U2.41 U100.5 U500.5 U501.5 U503.10 | length 105.3
  Top Layer w0.15: C512.2@275.45,86.8 C512.2@275.5,86.75 ; v3(278.1,90.7) 278.062,90.738 278.062,90.862 278.975,91.775 C14.2@278.975,93.1 ; 282.6,78 282.864,78.264 282.864,78.614 v2(282.95,78.7)
  Top Layer w0.2: C20.1@277.8,79 277.8,77.975 278.025,77.75 U501.5@278.1,77.75 279.5,77.75 U500.5@279.55,77.7 279.55,78.35 279.7,78.5 282.1,78.5 282.6,78 C19.1@282.6,77.4 ; C14.2@278.975,93.1 279.368,93.493 279.368,93.818 U2.41@279.402,93.851 ; v2(283.05,83.075) 284.525,83.075 R105.2@284.6,83
  Top Layer w0.3: C512.2@275.45,86.8 275.475,86.775 276.625,86.775 C513.2@276.65,86.8 ; C513.2@276.7,86.8 277.2,86.8 277.95,87.55 v2(277.95,87.6) ; 277.3,86.8 278.2,85.9 278.2,85.817 278.554,85.817 278.6,85.771 U503.10@278.6,85.7 ; R15.2@286.975,104.875 286.975,103.8 v3(287,103.8)
  Top Layer w0.5: D100.A@263.8,80 v1(265.9,80) ; U100.5@267.05,73.75 267.35,73.75 267.625,74.025 267.625,74.125 268.375,74.125 C104.2@268.5,74.25 269.85,74.25 269.75,74.4 v2(269.75,77.25)
  Bottom Layer w0.15: v2(277.95,87.6) 276.925,88.625 275.25,88.625 275.162,88.713 275.162,90.612 275.25,90.7 v3(278.1,90.7)
  Bottom Layer w0.3: 271.2,78.7 271.2,88.154 270.8,88.554 270.8,96.149 278.376,103.725 285.169,103.725 285.244,103.8 v3(287,103.8)
  Bottom Layer w0.5: v1(265.9,80) 268.65,77.25 v2(269.75,77.25) 271.2,78.7 v2(282.95,78.7) 282.95,81.775 283.05,81.875 v2(283.05,83.075) 282,83.075 281.75,83.325 278.218,83.325 277.925,83.618 277.925,85.695 277.95,85.72 v2(277.95,87.6)
+5V: C101.2 C107.2 C508.2 D103.A L100.2 R508.1 U101.1 U101.4 | length 47.3
  Top Layer w0.5: C107.2@261.25,100.25 v3(261.249,102) ; C107.2@261.25,100.25 261.35,100.25 261.5,100.1 261.5,99.843 261.672,99.672 U101.1@263.072,99.672 263.122,99.622 263.628,99.622 264.5,98.75 264.5,98.693 265.422,97.772 U101.4@265.672,97.772 ; D103.A@265.3,75.285 265.365,75.35 265.5,75.35 270.5,80.35 R508.1@270.5,80.4 270.45,80.45 270.45,81.2 C508.2@270.3,81.35 270.2,81.35 268.7,82.85 268.7,84.525 ; C101.2@267.4,84.55 267.55,84.4 268.575,84.4 268.7,84.525 ; v2(269.6,86.4) L100.2@268.7,86.4 268.7,84.525
  Bottom Layer w0.5: v3(261.249,102) 261.249,98.06 261.022,97.832 261.022,91.39 261.315,91.097 268.503,91.097 269.581,90.019 269.581,86.419 v2(269.6,86.4)
+5V_Flt: C102.2 C103.2 R100.2 U100.1 | length 4.7
  Top Layer w0.5: R100.2@263.2,75.85 263.225,75.825 263.225,73.925 C102.2@263.25,73.9 ; C103.2@263.25,72.75 C102.2@263.25,73.9 ; U100.1@264.75,73.75 264.45,73.75 264.3,73.9 C102.2@263.25,73.9
ADC_IN+: C507.1 R506.1 U503.2 | length 3.6
  Top Layer w0.2: R506.1@277.8,79.9 278.85,79.9 C507.1@279.2,79.55 ; U503.2@279.1,81.5 279.119,81.481 279.119,80.231 279.2,80.15 C507.1@279.2,79.55 ; C507.1@279.2,79.5 C507.1@279.2,79.55
ADC_IN-: C507.2 R507.1 U503.3 | length 3.3
  Top Layer w0.2: U503.3@279.6,81.5 279.619,81.481 279.619,80.494 279.914,80.2 280.083,80.2 280.2,80.083 C507.2@280.2,79.5 R507.1@281.2,79.5
ADC_SCK: R509.2 U503.8 | length 8.5
  Top Layer w0.2: U503.8@279.6,85.7 279.619,85.681 279.619,84.694 280.339,83.975 285.683,83.975 285.8,84.092 R509.2@285.8,85.1
ADC_VRef: C510.2 C511.2 U502.2 U503.1 | length 6.8
  Top Layer w0.2: C510.2@276.7,82.85 277.45,82.85 278.05,82.25 278.554,82.25 278.6,82.204 U503.1@278.6,81.5
  Top Layer w0.5: U502.2@274.95,81.15 275,81.2 275,82 275.7,82.7 276.55,82.7 C510.2@276.7,82.85 C511.2@276.7,83.9
ADC_VRef_VIN: C509.2 R508.2 U502.1 | length 2.5
  Top Layer w0.5: R508.2@271.5,80.4 271.55,80.45 271.55,81.2 C509.2@271.7,81.35 271.8,81.25 273,81.25 273.05,81.3 U502.1@273.05,81.375
BME_SDO: R400.1 U401.5 | length 4.9
  Top Layer w0.2: U401.5@294.875,101.825 294.8,101.825 294.625,101.65 294.501,101.65 294.325,101.474 294.325,99.349 295.224,98.45 295.7,98.45 295.9,98.25 R400.1@295.9,98.2
BME_VDDIO: C405.2 U401.6 | length 1.9
  Top Layer w0.15: U401.6@294.875,101.175 294.925,101.225 295.35,101.225 295.975,101.85 296,101.825 296.175,101.825 C405.2@296.4,101.6